# Altium PCB Shredmaster.PcbDoc (part 1 of 3)
Units mm, origin at the board's own origin, x right, y up, seen from the top; angles counter-clockwise.
Board outline 59.06 x 78.97 mm, 2 copper layers (Top Layer, Bottom Layer); 83 components, 53 nets, 219 pads, 109 vias.
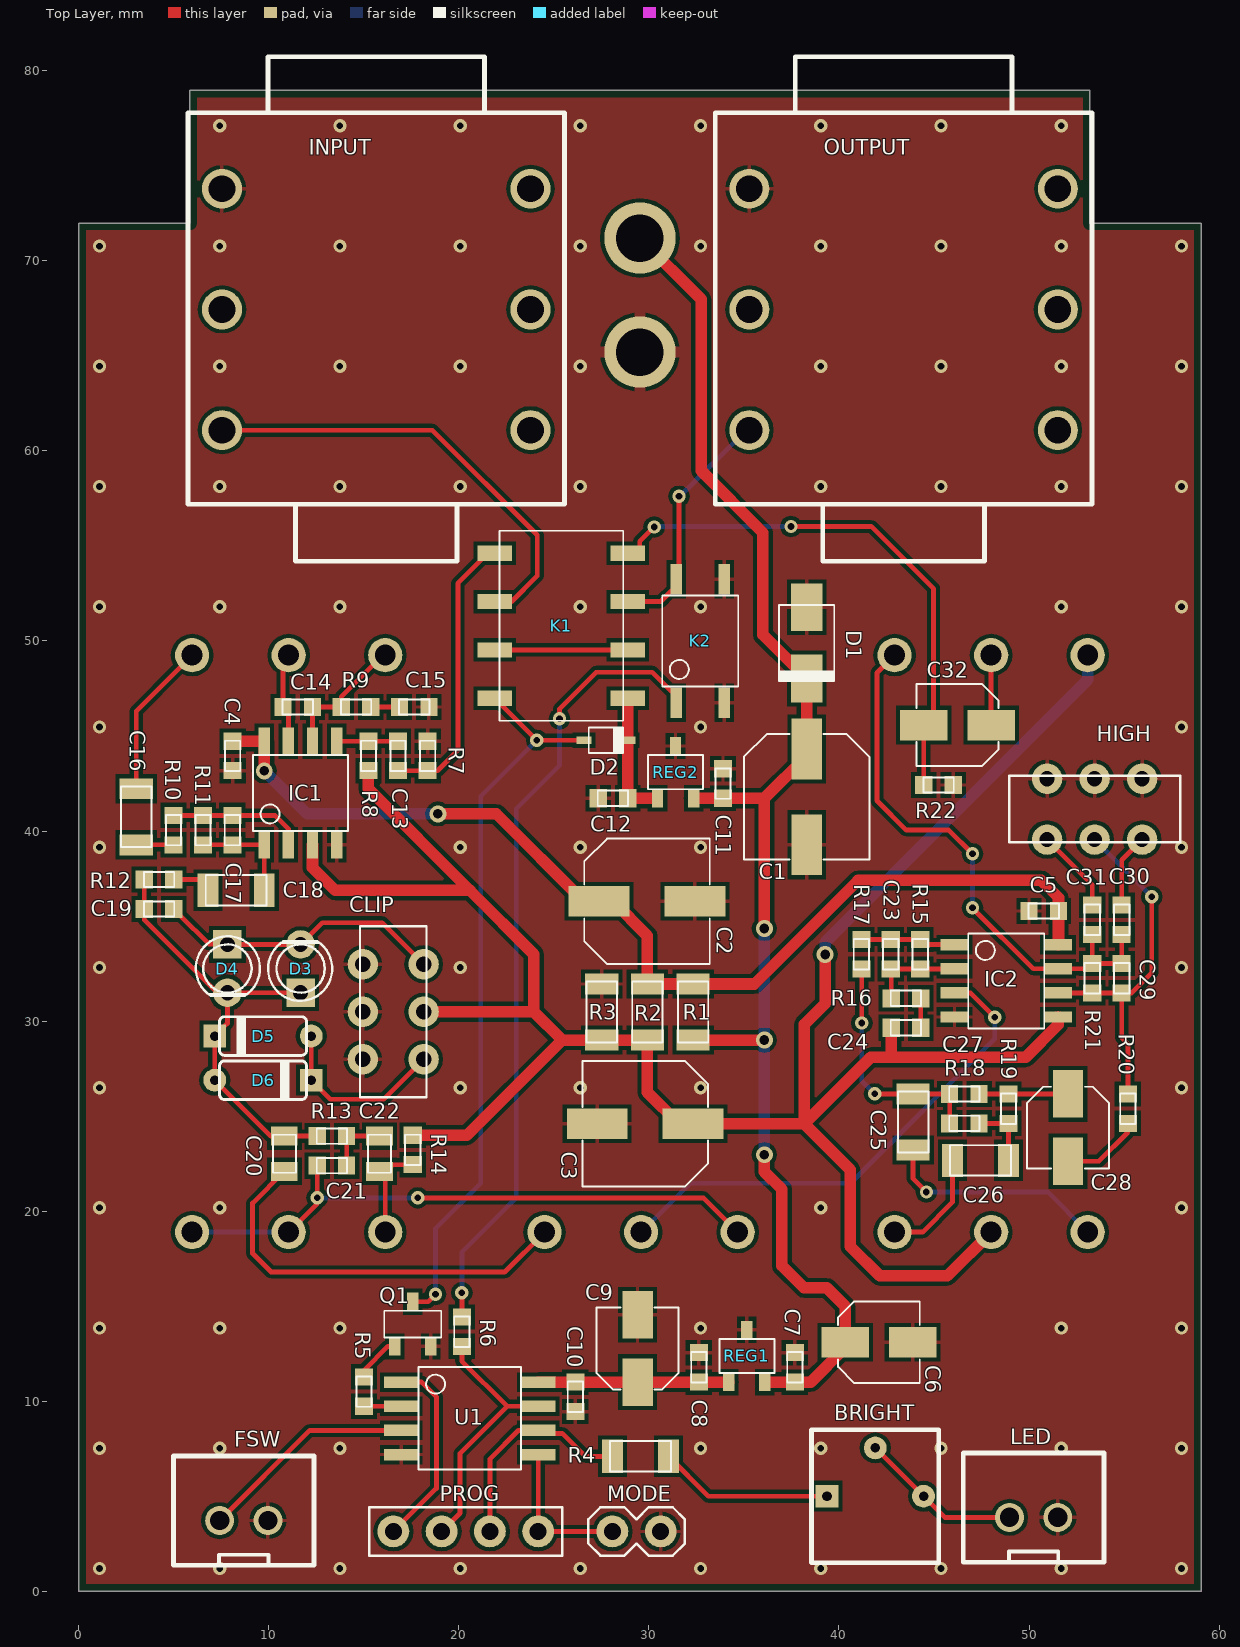
[diagram p0: Top Layer view]
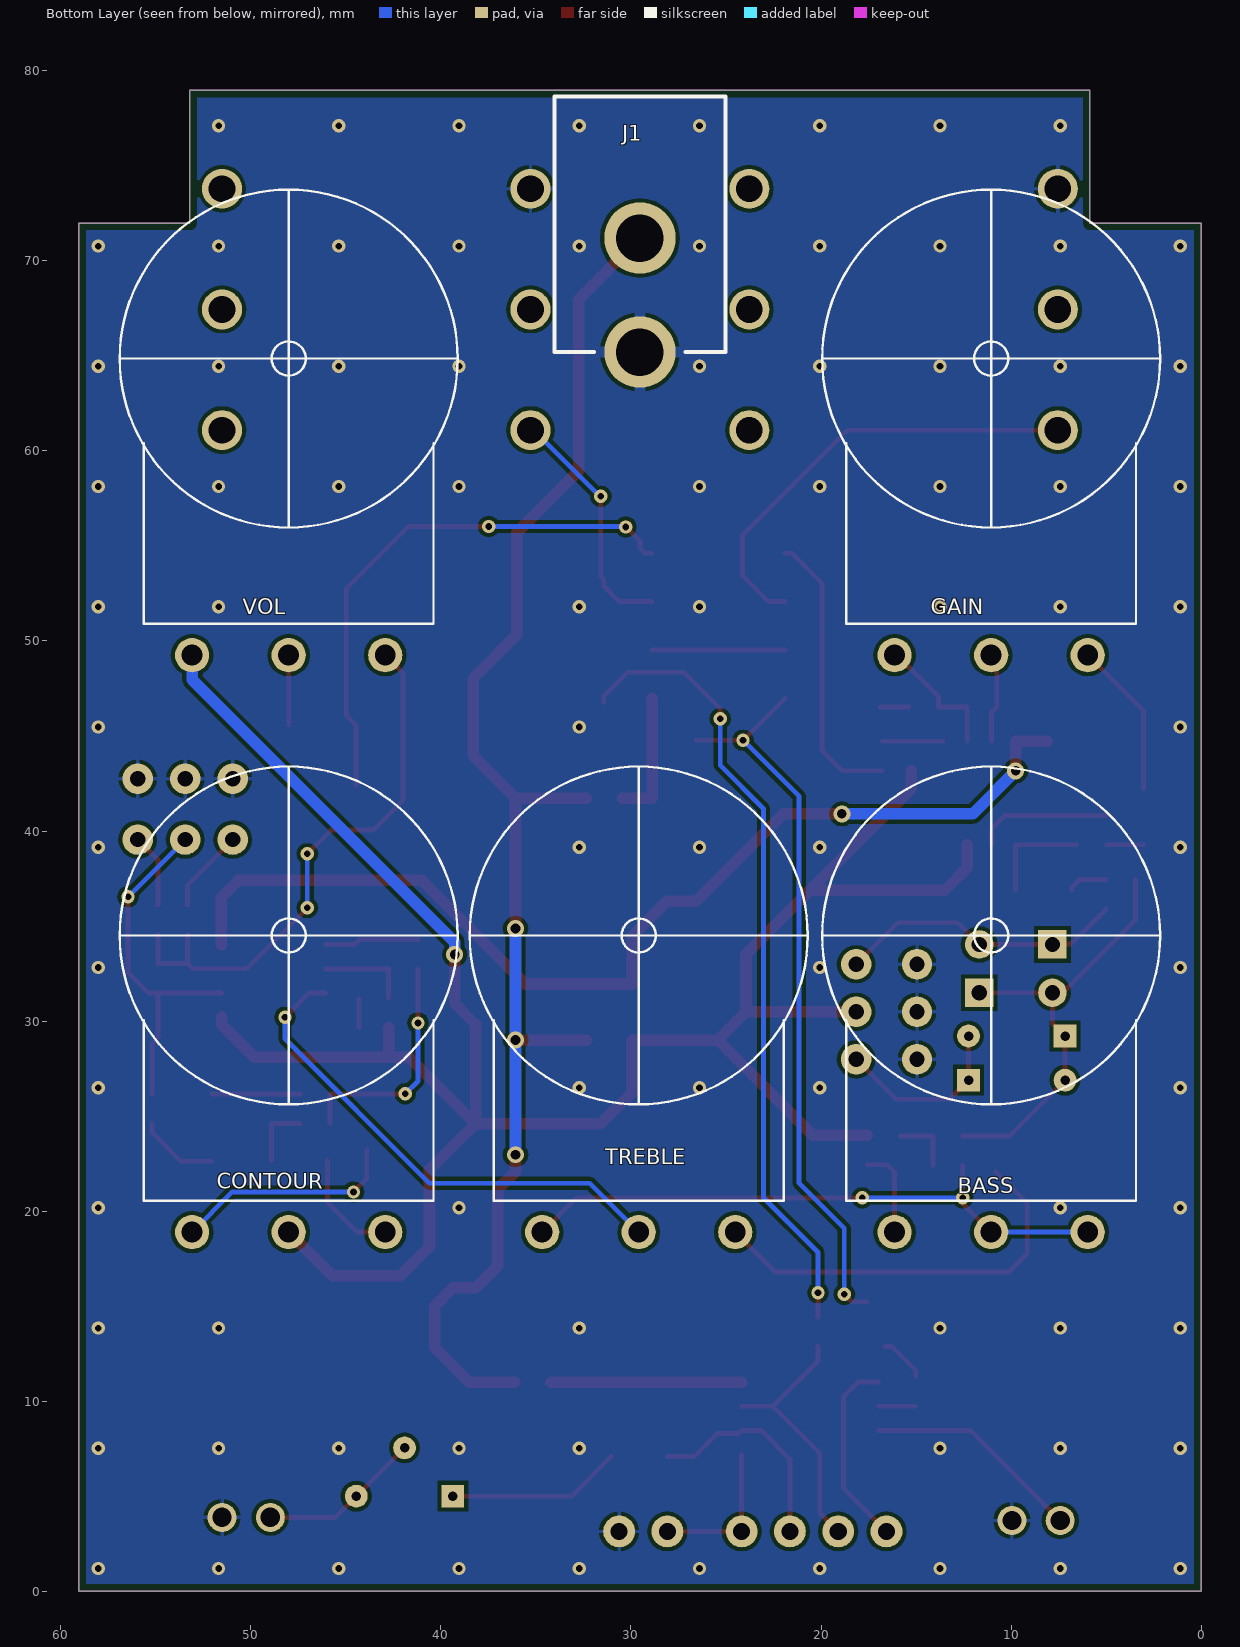
[diagram p1: Bottom Layer view, seen from below]
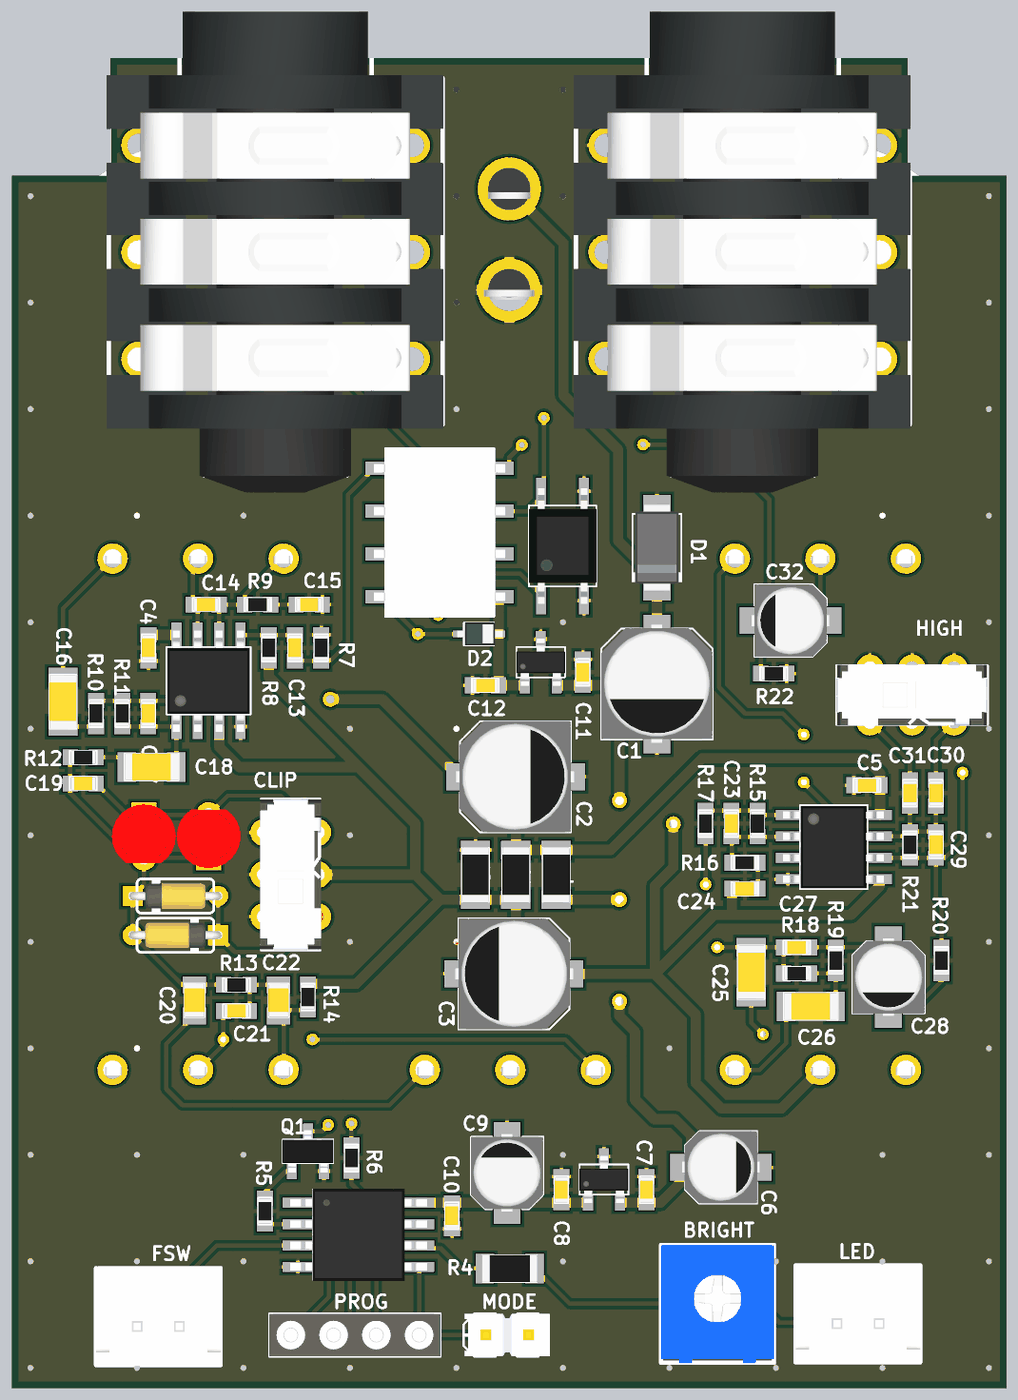
[diagram p2: 3D render of the assembled board from above, using the file's embedded part models]
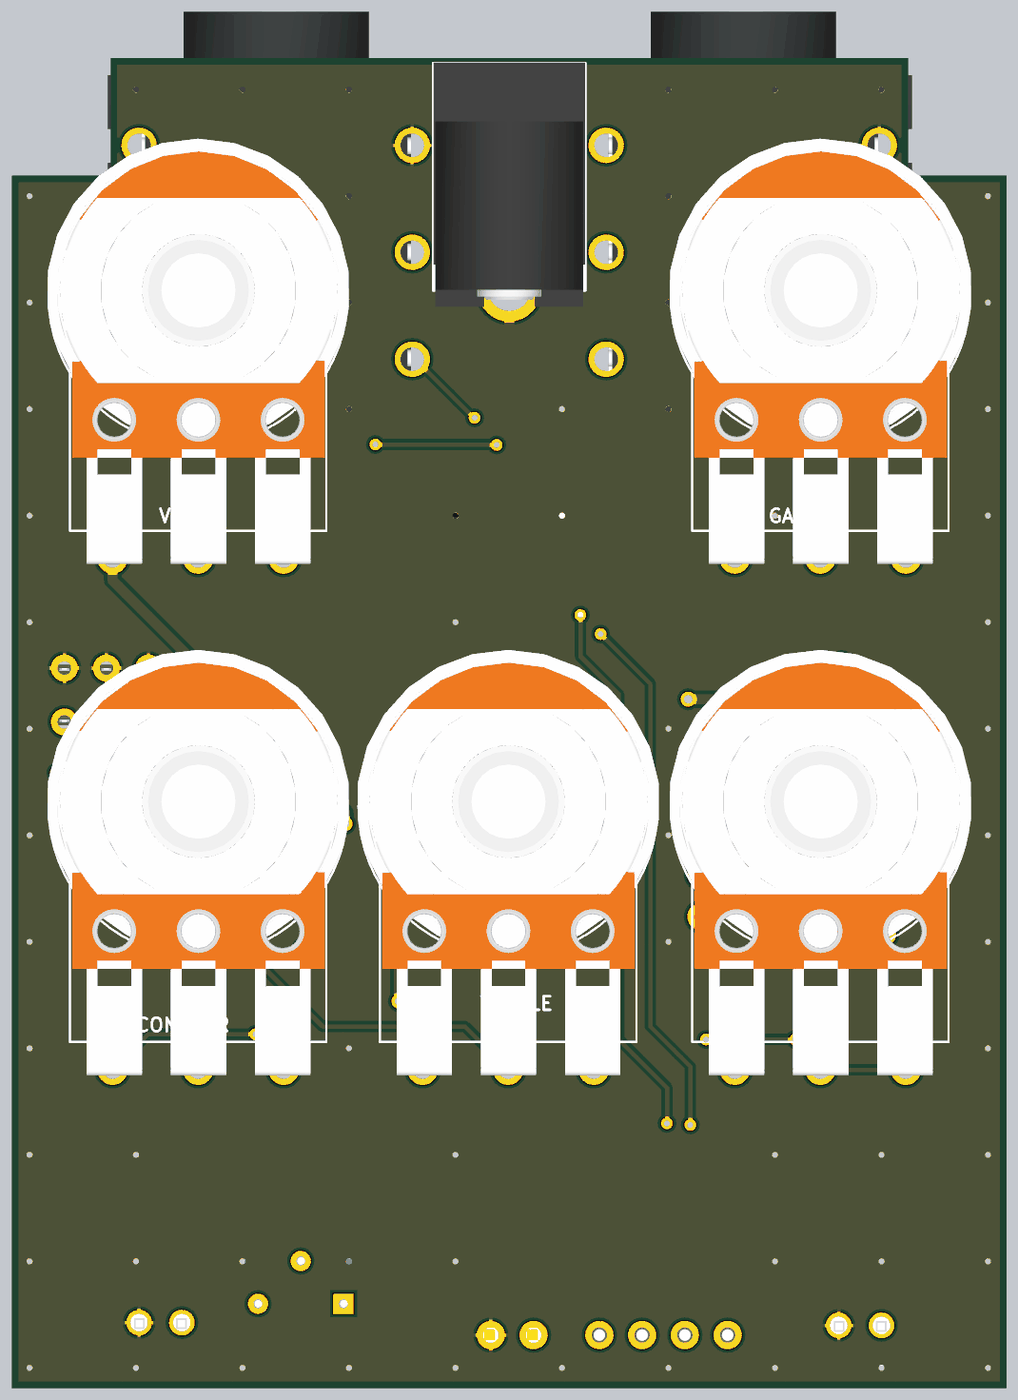
[diagram p3: 3D render of the assembled board from below, using the file's embedded part models]

## Layer stack, top to bottom
Top Solder: solder mask 0.0102, Solder Resist, Dk 3.5
Top Layer: signal copper 0.0356
Dielectric 1: dielectric 0.32, FR-4, Dk 4.8
Bottom Layer: signal copper 0.0356
Bottom Solder: solder mask 0.0102, Solder Resist, Dk 3.5

## Board outline
53.204,78.971 53.204,71.986 59.055,71.986 59.055,0 0,0 0,71.986 5.85,71.986 5.85,78.971

## Design rules (kind name [scope] priority, off if disabled: settings)
BoardOutlineClearance BottomOverlay [OnLayer('Bottom Overlay')] p1: gap=0 ignorepadtopadclearanceinfootprint=FALSE
BoardOutlineClearance TopOverlay [OnLayer('Top Overlay')] p2: gap=0 ignorepadtopadclearanceinfootprint=FALSE
BoardOutlineClearance [All] p3: gap=0.381 ignorepadtopadclearanceinfootprint=FALSE
Clearance [All] p1: gap=0.203 ignorepadtopadclearanceinfootprint=FALSE except(0: Arc-Text Arc-Hole Track-Text Track-Hole SMDPad-Text SMDPad-Hole THPad-Text THPad-Hole Via-Text Via-Hole Fill-Text Fill-Hole Poly-Text Poly-Hole Region-Text Region-Hole Text-Text Text-Hole)
ComponentClearance [All] p1 off: gap=0.025 collisioncheckmode=3 verticalgap=0.025 showdistances=FALSE
DiffPairsRouting [All] p1: maxlimit=10 minlimit=0.152 mostfreqgap=0.203 toplayer_minwidth=0.152 toplayer_maxwidth=0.381 toplayer_prefwidth=0.203 bottomlayer_minwidth=0.152 bottomlayer_maxwidth=0.381 bottomlayer_prefwidth=0.203 maxuncoupledlength=12.7
Height [All] p1 off: minheight=0 maxheight=25.4 prefheight=12.7
HoleSize [All] p1: absolutevalues=TRUE maxlimit=6.731 minlimit=0.3 maxpercent=80.000 minpercent=20.000
HoleToHoleClearance [All] p1: gap=0.254 allowstackedmicrovias=FALSE
MinimumAnnularRing [All] p1: minimumring=0.152
MinimumSolderMaskSliver [All] p1: minsoldermaskwidth=0
PlaneClearance [All] p1: clearance=0.254
PlaneConnect [All] p1: planeconnectstyle=Direct reliefexpansion=0.406 reliefentries=4 reliefconductorwidth=0.152 reliefairgap=0.152
PolygonConnect PolygonConnect_J1 [InComponent ('J1')] p1: connectstyle=Relief reliefconductorwidth=0.61 reliefentries=4 polygonreliefangle="90 Angle" airgapwidth=0.203
PolygonConnect [All] p2: thpad.connectstyle=Relief thpad.reliefconductorwidth=0.203 thpad.reliefentries=4 thpad.polygonreliefangle="90 Angle" thpad.airgapwidth=0.203 smdpad.connectstyle=Relief smdpad.reliefconductorwidth=0.203 smdpad.reliefentries=4 smdpad.polygonreliefangle="90 Angle" smdpad.airgapwidth=0.203 via.connectstyle=Direct via.reliefconductorwidth=0.203 via.reliefentries=4 via.polygonreliefangle="90 Angle" via.airgapwidth=0.203
RoutingCorners [All] p1: cornerstyle=45-Degree minsetback=1.25 maxsetback=1.25
RoutingVias [All] p1: holewidth=0.35 width=0.7 viastyle="Through Hole" minholewidth=0.35 minwidth=0.7 maxholewidth=2.54 maxwidth=2.896
SilkToSilkClearance [All] p1 off: silktosilkclearance=0
SilkToSolderMaskClearance [IsPad] p1 off: minsilkscreentomaskgap=0.152 clearancetoexposedcopper=TRUE
SolderMaskExpansion [All] p1: expansion=0.075
Width [All] p1: maxlimit=0.61 minlimit=0.254 preferedwidth=0.254 minimp=50.000000 maximp=50.000000 favimp=50.000000
19 further rules are at their usual default settings.

## Components (designator, comment, footprint, x,y, rotation, side; value= is the part's Value field where it differs from the comment)
BASS "100kA" ALPHA_16mm_BOTTOM 11.049,18.884 r180 bottom locked
BRIGHT "10kB" BOURNS_3362P 41.904,5.006 r0 top
C1 "100u" CAPAE_D 38.3,41.8 r270 top
C2 "100u" CAPAE_D 29.9,36.3 r0 top
C3 "47u" CAPAE_D 29.8,24.6 r180 top
C4 "100n" CHIP_0603 8.103,43.95 r270 top
C5 "100n" CHIP_0603 50.775,35.794 r180 top
C6 "10u" CAPAE_B 42.101,13.107 r0 top
C7 "100n" CHIP_0603 37.68,11.782 r90 top
C8 "100n" CHIP_0603 32.63,11.782 r90 top
C9 "10u" CAPAE_B 29.403,12.779 r90 top
C10 "100n" CHIP_0603 26.131,10.232 r270 top
C11 "100n" CHIP_0603 33.9,42.5 r90 top
C12 "100n" CHIP_0603 28.111,41.725 r180 top
C13 "10n" CHIP_0603 16.797,43.95 r270 top
C14 "100p" CHIP_0603 11.527,46.522 r0 top
C15 "47n" CHIP_0603 17.647,46.525 r0 top
C16 "100n" CHIP_1206 3.025,40.75 r90 top
C17 "47p" CHIP_0603 8.086,40.05 r90 top
C18 "100n" CHIP_1206 8.287,36.884 r0 top
C19 "2.2n" CHIP_0603 4.226,35.9 r0 top
C20 "22n" CHIP_0805 10.825,23.022 r90 top
C21 "220n" CHIP_0603 13.325,22.397 r0 top
C22 "22n" CHIP_0805 15.825,23.022 r90 top
C23 "2.2n" CHIP_0603 42.725,33.519 r270 top
C24 "220n" CHIP_0603 43.525,29.65 r0 top
C25 "100n" CHIP_1206 43.9,24.694 r270 top
C26 "47n" CHIP_1206 47.442,22.669 r180 top
C27 "1n" CHIP_0603 46.6,26.169 r180 top
C28 "1u" CAPAE_B 52.05,24.397 r270 top
C29 "220p" CHIP_0603 54.875,32.259 r270 top
C30 "220p" CHIP_0603 54.875,35.325 r90 top
C31 "680p" CHIP_0603 53.325,35.325 r90 top
C32 "1u" CAPAE_B 46.234,45.575 r180 top
CLIP "DPDT" DPDT_SLIDE 14.8,34.99 r270 top
CONTOUR "100kB" ALPHA_16mm_BOTTOM 48.006,18.884 r180 bottom locked
D1 "S1A" DO214 38.3,49.9 r90 top
D2 "1N4148WS" SOD323 27.736,44.775 r180 top
D3 "D_LED" LED_3MM 11.675,32.765 r90 top
D4 "D_LED" LED_3MM 7.825,32.765 r270 top
D5 "1N4148" DO35_2 9.7,29.215 r0 top
D6 "1N4148" DO35_2 9.7,26.89 r180 top
FSW "J_JST-XH-02" JST-XH-02 8.687,3.725 r0 top
GAIN "250kB" ALPHA_16mm_BOTTOM 11.049,49.237 r180 bottom locked
HIGH "DPDT" DPDT_SLIDE 57.95,42.9 r180 top
IC1 "TL072" SO-8 11.667,42 r90 top
IC2 "TL072" SO-8 48.8,32.119 r0 top
INPUT "J_STEREO" STEREO 15.657,67.439 r90 top locked
J1 "J_DC_JACK" DC_JACK 29.528,75.851 r0 bottom locked
K1 "G6K" G6K 25.5,50.8 r180 top
K2 "TLP175A" TLP175A 32.7,50 r90 top
LED "J_JST-XH-02" JST-XH-02 50.24,3.889 r0 top
MODE "J_HEADER_2PINS" HEADER_2PINS 29.351,3.15 r0 top
OUTPUT "J_STEREO" STEREO 43.398,67.439 r90 top locked
PROG "J_HEADER_4PINS_FEM" HEADER_4Pins_FEM 17.825,3.15 r0 top
Q1 "MMBT3904" SOT23 17.575,14.06 r90 top
R1 "47R" CHIP_R_1206 32.322,30.478 r90 top
R2 "47k" CHIP_R_1206 29.922,30.478 r270 top
R3 "47k" CHIP_R_1206 27.522,30.478 r270 top
R4 "220R" CHIP_R_1206 29.556,7.1 r0 top
R5 "22k" CHIP_R_0603 15.016,10.51 r90 top
R6 "1k" CHIP_R_0603 20.16,13.66 r90 top
R7 "10M" CHIP_R_0603 18.36,43.95 r270 top
R8 "1M" CHIP_R_0603 15.245,43.95 r270 top
R9 "3.3k" CHIP_R_0603 14.591,46.522 r180 top
R10 "10k" CHIP_R_0603 4.986,40.05 r90 top
R11 "680k" CHIP_R_0603 6.536,40.05 r270 top
R12 "10k" CHIP_R_0603 4.226,37.45 r180 top
R13 "6.8k" CHIP_R_0603 13.325,23.947 r180 top
R14 "1k" CHIP_R_0603 17.575,23.222 r270 top
R15 "220k" CHIP_R_0603 44.275,33.519 r90 top
R16 "47k" CHIP_R_0603 43.525,31.2 r0 top
R17 "100R" CHIP_R_0603 41.175,33.519 r270 top
R18 "33k" CHIP_R_0603 46.6,24.619 r0 top
R19 "33k" CHIP_R_0603 48.917,25.394 r90 top
R20 "100k" CHIP_R_0603 55.2,25.394 r90 top
R21 "100k" CHIP_R_0603 53.325,32.259 r90 top
R22 "1M" CHIP_R_0603 45.237,42.425 r180 top
REG1 "78L05" SOT23-3 35.155,12.382 r90 top
REG2 "78L05" SOT23-3 31.4,43.1 r90 top
TREBLE "25kB" ALPHA_16mm_BOTTOM 29.591,18.884 r180 bottom locked
U1 "ATTINY85" SOP8 20.575,9.1 r0 top
VOL "100kA" ALPHA_16mm_BOTTOM 48.006,49.237 r180 bottom locked

## Footprints (in the part's own frame and the unit in brackets; to place one, negate y for a bottom-side part, rotate by r counter-clockwise, add the part's x,y. Pads: shape width x height; smd on the part's side, far side on the other; paste and mask are expansions set on the pad)
ALPHA_16mm_BOTTOM [mm]
  round 1.8 hole 1.1: 1(-5.08,0.016) 2(0,0.016) 3(5.08,0.016)
  silkscreen extent -8.89,1.67 8.89,24.51, body extent -8.99,-0.31 11.3,24.95, height 27.09
BOURNS_3362P [mm]
  rect 1.2x1.2 hole 0.5: 1(-2.534,0)
  round 1.2 hole 0.5: 2(0.006,2.54) 3(2.546,0)
  silkscreen extent -3.35,-3.51 3.35,3.49, body extent -3.35,-3.53 3.35,3.51, height 4.88
CAPAE_B [mm] "Aluminum Electrolytic Capacitor, Body 4.30x4.30x5.40mm, IPC Low Density"
  rect 2.5x1.6 smd: +(-1.772,0) -(1.772,0)
  silkscreen extent -2.15,-2.15 2.15,2.15, body extent -2.3,-2.14 2.3,2.16, height 5.41
CAPAE_D [mm] "Aluminum Electrolytic Capacitor, Body 6.60x6.60x5.40mm, IPC Low Density"
  rect 3.2x1.6 smd: +(-2.521,0) -(2.521,0)
  silkscreen extent -3.3,-3.3 3.3,3.3, body extent -3.53,-3.3 3.47,3.3, height 5.41
CHIP_0603 [mm] "Chip Capacitor, 2-Leads, Body 1.60x0.80mm, IPC Medium Density"
  rect 0.9x0.95 smd: 1(-0.775,0) 2(0.775,0)
  silkscreen extent -0.8,-0.4 0.8,0.4, body extent -0.75,-0.4 0.75,0.4, height 0.65
CHIP_0805 [mm] "Chip Capacitor, 2-Leads, Body 2.00x1.25mm, IPC Medium Density"
  rect 1x1.4 smd: 1(-0.925,0) 2(0.925,0)
  silkscreen extent -1,-0.6 1,0.6, body extent -1,-0.6 1,0.6, height 0.7
CHIP_1206 [mm] "Chip Capacitor, 2-Leads, Body 3.20x1.60mm, IPC Medium Density"
  rect 1.1x1.75 smd: 1(-1.475,0) 2(1.475,0)
  silkscreen extent -1.6,-0.8 1.6,0.8, body extent -1.6,-0.8 1.6,0.8, height 1.05
CHIP_R_0603 [mm] "Chip Resistor, 2-Leads, Body 1.60x0.80mm, IPC Medium Density"
  rect 0.9x0.95 smd: 1(-0.775,0) 2(0.775,0)
  silkscreen extent -0.8,-0.4 0.8,0.4, body extent -0.75,-0.4 0.75,0.4, height 0.63
CHIP_R_1206 [mm] "Chip Resistor 2-Leads, Body 3.20x1.60mm, IPC Medium Density"
  rect 1.1x1.75 smd: 1(-1.475,0) 2(1.475,0)
  silkscreen extent -1.6,-0.8 1.6,0.8, body extent -1.65,-0.8 1.65,0.8, height 0.76
DC_JACK [mm]
  round 3.75 hole 2.5: GND(0,4.652) PWR(0,10.652)
  silkscreen extent -4.5,-2.79 4.5,10.65, body extent -8.89,-2.86 4.5,11.64, height 11
DO35_2 [mm]
  round 1.2 hole 0.5: A(2.54,0)
  rect 1.2x1.2 hole 0.5: C(-2.54,0)
  silkscreen extent -2.29,-1.02 2.29,1.02, body extent -2.75,-0.75 2.75,0.75, height 1.51
DO214 [mm] "Molded Diode, 2-Leads, Body 4.30x2.63mm, IPC Medium Density"
  rect 2.5x1.65 smd: 1(-1.875,0) 2(1.875,0)
  silkscreen extent -2,-1.45 2,1.45, body extent -2.6,-1.3 2.6,1.3, height 2.4
DPDT_SLIDE [mm]
  round 1.6 hole 0.8: A1(2,3.35) A2(4.5,3.35) A3(7,3.35) B1(2,0.15) B2(4.5,0.15) B3(7,0.15)
  silkscreen extent 0,0 9,3.5, body extent 0,-0.05 9,3.55, height 5.5
G6K [mm]
  rect 1.8x0.8 smd: 1(-3.386,3.81) 2(-3.386,1.27) 3(-3.386,-1.27) 4(-3.386,-3.81) 5(3.614,-3.81) 6(3.614,-1.27) 7(3.614,1.27) 8(3.614,3.81)
  silkscreen extent -3.15,-5 3.35,5, body extent -3.8,-5 4,5, height 5.2
HEADER_2PINS [mil]
  round 66 hole 35.43: 1(50,0) 2(-50,0)
  silkscreen extent -100,-50 100,50, body extent -102,-50 102,50, height 330
HEADER_4Pins_FEM [mil]
  round 66 hole 35.43: 1(-50,0) 2(50,0) 3(150,0) 4(250,0)
  silkscreen extent -100,-50 300,50, body extent -100,-50 300,50, height 237
JST-XH-02 [mil]
  round 60 hole 40: 1(-50,0) 2(50,0)
  silkscreen extent -146,-93 146,134, body extent -146,-95 146,131, height 276
LED_3MM [mil]
  rect 59.06x59.06 hole 31.5: ANODE(-50,0)
  round 59.06 hole 31.5: P$1(50,0)
  silkscreen extent -67,-65 56,67, body extent -75,-75 160,75, height 221
SO-8 [mm] "SOIC, 8-Leads, Body 4.90x3.90mm, Pitch 1.27mm, IPC Medium Density"
  rect 1.45x0.6 smd: 1(-2.725,1.905) 2(-2.725,0.635) 3(-2.725,-0.635) 4(-2.725,-1.905) 5(2.725,-1.905) 6(2.725,-0.635) 7(2.725,0.635) 8(2.725,1.905)
  silkscreen extent -2,-2.5 2,2.5, body extent -3.02,-2.45 2.98,2.45, height 1.75
SOD323 [mm] "SODFL, 2-Leads, Body 1.25x2.50mm, IPC Medium Density"
  rect 0.8x0.4 smd: 1(-1.15,0) 2(1.15,0)
  silkscreen extent -0.9,-0.68 0.9,0.67, body extent -1.4,-0.68 1.3,0.67, height 0.79
SOP8 [mm] "SOP, 8-Leads, Body 5.24x5.29mm, Pitch 1.27mm, IPC Medium Density"
  rect 1.8x0.6 smd: 1(-3.6,1.905) 2(-3.6,0.635) 3(-3.6,-0.635) 4(-3.6,-1.905) 5(3.6,-1.905) 6(3.6,-0.635) 7(3.6,0.635) 8(3.6,1.905)
  silkscreen extent -2.7,-2.7 2.7,2.7, body extent -4.07,-2.74 4.07,2.74, height 1.9
SOT23 [mm] "SOT23, 3-Leads, Body 2.90x2.35mm, Pitch 0.95mm, IPC Medium Density"
  rect 0.95x0.6 smd: 1(-1.175,0.95) 2(-1.175,-0.95) 3(1.175,0)
  silkscreen extent -0.7,-1.5 0.7,1.5, body extent -1.25,-1.5 1.25,1.5, height 1.05
SOT23-3 [mm] "SOT23, 3-Leads, Body 2.80x2.80mm, Pitch 0.95mm, IPC Medium Density"
  rect 0.95x0.6 smd: 1(-1.375,0.95) 2(-1.375,-0.95) 3(1.375,0)
  silkscreen extent -0.9,-1.45 0.9,1.45, body extent -1.4,-1.45 1.4,1.45, height 1.3
STEREO [mm]
  round 2.1 hole 1.4: R(0,8.115) RN(0,-8.115) S(6.35,8.115) SN(6.35,-8.115) T(-6.35,8.115) TN(-6.35,-8.115)
  silkscreen extent -13.25,-9.91 13.3,9.91, body extent -14.28,-9.97 14.28,10.03, height 15.5
TLP175A [mm] "SOP, 4-Leads, Body 3.75x4.60mm, Pitch 2.54mm, IPC Medium Density"
  rect 1.6x0.6 smd: 1(-3.25,1.27) 3(-3.25,-1.27) 4(3.25,-1.27) 6(3.25,1.27)
  silkscreen extent -2.4,-2 2.4,2, body extent -3.43,-2 3.43,2, height 2.02

## Part data
BASS VOL: library part POT_100kA_ALPHA_16mm, "100k Log potentiometer round shaft", Package="PCB Mounted", Dimensions=16mm, Price=0.5
BRIGHT: library part TRIM_10kB_3362P, "10k Lin 3362P trimmer", Price=0.1
C1 C2: library part MCVVT025M101EA6L, "CAP ALUM 100UF 25V SMD", Capacitance=100uF, Manufacturer=Multicomp, Max Operating Temperature=105°C, Min Operating Temperature=-55°C, Ripple Current (AC)=6.3mA, Supplier Part Number 1=2611370, Voltage Rating=25V, ComponentLink1Description=http://www.farnell.com/datasheets/2151198.pdf?src-supplier=Element14, ComponentLink1URL=http://www.farnell.com/datasheets/2151198.pdf?src-supplier=Element14, Diameter=6.3mm, Height=7.7mm, Life (Hours)=2000Hour, Manufacturer Part Number=MCVVT025M101EA6L, Packaging="Tape and Reel", Pricing="1=0.157, 50=0.104, 100=0.0932, 250=0.0801, 500=0.0681 (EUR)", REACH SVHC="No SVHC", RoHS=No, Stock=1063, Supplier 1=Farnell, Voltage Rating (DC)=25V
C3: library part MCVVT025M470EA1L, "CAP ALUM 47UF 25V SMD", Capacitance=47uF, Manufacturer=Multicomp, Max Operating Temperature=105°C, Min Operating Temperature=-55°C, Ripple Current (AC)=6.3mA, Supplier Part Number 1=2611377, Voltage Rating=25V, ComponentLink1Description=http://www.farnell.com/datasheets/2151198.pdf?src-supplier=Farnell, ComponentLink1URL=http://www.farnell.com/datasheets/2151198.pdf?src-supplier=Farnell, ComponentLink2Description=http://www.farnell.com/datasheets/2151198.pdf?src-supplier=Element14, ComponentLink2URL=http://www.farnell.com/datasheets/2151198.pdf?src-supplier=Element14, Diameter=6.3mm, Height=5.4mm, Life (Hours)=2000Hour, Manufacturer Part Number=MCVVT025M470EA1L, Packaging="Cut Tape", Pricing="1=0.125, 50=0.0825, 100=0.0741, 250=0.0637, 500=0.0542 (EUR)", REACH SVHC="No SVHC", RoHS=No, Stock=1436, Supplier 1=Farnell, Voltage Rating (DC)=25V
C4 C5 C7 C8 C10 C11 C12: library part MC0603B104K500CT, "CAP CER 100NF 50V X7R 0603", Capacitance=100nF, Case/Package=0603, Case Code (Metric)=1608, Dielectric=X7R, Manufacturer=Multicomp, Max Operating Temperature=125°C, Min Operating Temperature=-55°C, Supplier Part Number 1=1759122, Tolerance=10%, Voltage Rating=50V, Case Code (Imperial)=0603, ComponentLink1Description=https://datasheet.ciiva.com/22686/1901289-22686278.pdf?src-supplier=Element14, ComponentLink1URL=https://datasheet.ciiva.com/22686/1901289-22686278.pdf?src-supplier=Element14, ComponentLink2Description=https://datasheet.ciiva.com/22686/1901289-22686279.pdf?src-supplier=Element14, ComponentLink2URL=https://datasheet.ciiva.com/22686/1901289-22686279.pdf?src-supplier=Element14, ComponentLink3Description=https://datasheet.ciiva.com/22648/1901289-22648411.pdf?src-supplier=Element14, ComponentLink3URL=https://datasheet.ciiva.com/22648/1901289-22648411.pdf?src-supplier=Element14, Manufacturer Part Number=MC0603B104K500CT, Number of Pins=2, Packaging="Cut Tape", REACH SVHC=Unknown, RoHS=Yes, Stock 1=1057763, Supplier 1=Farnell, Voltage Rating (DC)=50V
C6 C9: library part MCVVT025M100CA1L, "CAP ALUM 10UF 25V SMD", Capacitance=10uF, Manufacturer=Multicomp, Max Operating Temperature=105°C, Min Operating Temperature=-55°C, Ripple Current (AC)=4mA, Supplier Part Number 1=2611368, Voltage Rating=25V, ComponentLink1Description=http://www.farnell.com/datasheets/2151198.pdf?src-supplier=Element14, ComponentLink1URL=http://www.farnell.com/datasheets/2151198.pdf?src-supplier=Element14, Diameter=4mm, Height=5.4mm, Life (Hours)=2000Hour, Manufacturer Part Number=MCVVT025M100CA1L, Packaging="Cut Tape", Pricing="5=0.0897, 50=0.0592, 250=0.0457, 500=0.0388, 1000=0.0338 (EUR)", REACH SVHC="No SVHC", RoHS=No, Stock=2773, Supplier 1=Farnell, Voltage Rating (DC)=25V
C13: library part GRM1885C1H103JA01D, "CAP CER 10NF 50V C0G/NP0 0603", Capacitance=10nF, Case/Package=0603, Case Code (Metric)=1608, Dielectric=C0G, Manufacturer=Murata, Max Operating Temperature=125°C, Min Operating Temperature=-55°C, Package Quantity=4000, Supplier Part Number 1=2456107, Tolerance=5%, Voltage=50V, Case Code (Imperial)=0603, ComponentLink1Description=https://datasheet.ciiva.com/29537/partnumbering-e-01-29537910.pdf?src-supplier=Digi-Key, ComponentLink1URL=https://datasheet.ciiva.com/29537/partnumbering-e-01-29537910.pdf?src-supplier=Digi-Key, ComponentLink2Description=https://datasheet.ciiva.com/41860/partnumbering-e-01-41860759.pdf?src-supplier=Digi-Key, ComponentLink2URL=https://datasheet.ciiva.com/41860/partnumbering-e-01-41860759.pdf?src-supplier=Digi-Key, Depth=0.8mm, Height=0.8mm, Lead Free="Lead Free", Lead Pitch=0.5mm, Length=1.6mm, Manufacturer Part Number=GRM1885C1H103JA01D, Material=Ceramic, Mount="Surface Mount", Packaging="Tape and Reel", Pricing 1="10 = 0.16600, 100 = 0.07230, 500 = 0.04810, 1000 = 0.04130, 2000 = 0.03640 (EUR)", REACH SVHC="No SVHC", RoHS=Yes, Stock 1=99456, Supplier 1=Farnell, Termination=SMD/SMT, Thickness=0.035inch, Voltage Rating=50V, Voltage Rating (DC)=50V, Width=0.8mm
C14: library part MC0603N101J500CT, "CAP CER 100PF 50V C0G/NP0 0603", Capacitance=100pF, Case Code (Imperial)=0603, Case Code (Metric)=1608, Dielectric=C0G, Manufacturer=Multicomp, Max Operating Temperature=125°C, Min Operating Temperature=-55°C, Supplier Part Number 1=1759066, Tolerance=5%, Voltage Rating=50V, ComponentLink1Description=http://www.farnell.com/datasheets/1901289.pdf?src-supplier=Farnell, ComponentLink1URL=http://www.farnell.com/datasheets/1901289.pdf?src-supplier=Farnell, ComponentLink2Description=http://www.farnell.com/datasheets/1901289.pdf?src-supplier=Element14, ComponentLink2URL=http://www.farnell.com/datasheets/1901289.pdf?src-supplier=Element14, ComponentLink3Description=http://www.farnell.com/datasheets/1870456.pdf?src-supplier=Element14, ComponentLink3URL=http://www.farnell.com/datasheets/1870456.pdf?src-supplier=Element14, ComponentLink4Description=http://www.farnell.com/datasheets/1901289.pdf?src-supplier=Newark, ComponentLink4URL=http://www.farnell.com/datasheets/1901289.pdf?src-supplier=Newark, Manufacturer Part Number=MC0603N101J500CT, Packaging="Cut Tape", Pricing="10=0.0241, 100=0.0195, 500=0.0139, 1000=0.012, 2000=0.0095 (EUR)", REACH SVHC="No SVHC", RoHS=Yes, Stock=55061, Supplier 1=Farnell, Voltage Rating (DC)=50V
C15: library part MC0603B473K500CT, "CAP CER 47NF 50V X7R 0603", Capacitance=47nF, Case/Package=0603, Case Code (Metric)=1608, Dielectric=X7R, Manufacturer=Multicomp, Max Operating Temperature=125°C, Min Operating Temperature=-55°C, Supplier Part Number 1=1759116, Tolerance=10%, Voltage Rating=50V, Case Code (Imperial)=0603, ComponentLink1Description=https://datasheet.ciiva.com/7818/ta-1098-7818535.pdf?src-supplier=Element14, ComponentLink1URL=https://datasheet.ciiva.com/7818/ta-1098-7818535.pdf?src-supplier=Element14, ComponentLink2Description=https://datasheet.ciiva.com/6161/ta-1098-6161001.pdf?src-supplier=Farnell, ComponentLink2URL=https://datasheet.ciiva.com/6161/ta-1098-6161001.pdf?src-supplier=Farnell, ComponentLink3Description=https://datasheet.ciiva.com/22648/1901289-22648457.pdf?src-supplier=Element14, ComponentLink3URL=https://datasheet.ciiva.com/22648/1901289-22648457.pdf?src-supplier=Element14, ComponentLink4Description=https://datasheet.ciiva.com/22648/1901289-22648459.pdf?src-supplier=Element14, ComponentLink4URL=https://datasheet.ciiva.com/22648/1901289-22648459.pdf?src-supplier=Element14, ComponentLink5Description=https://datasheet.ciiva.com/22683/1901289-22683835.pdf?src-supplier=Element14, ComponentLink5URL=https://datasheet.ciiva.com/22683/1901289-22683835.pdf?src-supplier=Element14, Manufacturer Part Number=MC0603B473K500CT, Number of Pins=2, Packaging="Cut Tape", Pricing="10=0.0277, 100=0.0224, 500=0.0139, 1000=0.011, 2000=0.0101 (EUR)", REACH SVHC=Unknown, RoHS=Yes, Stock=25480, Supplier 1=Farnell, Voltage Rating (DC)=50V
C16 C18 C25: library part GRM31C5C1H104JA01L, "CAP CER 100NF 50V C0G/NP0 1206", Capacitance=100nF, Case/Package=1206, Case Code (Metric)=3216, Dielectric=C0G, Manufacturer=Murata, Max Operating Temperature=125°C, Min Operating Temperature=-55°C, Package Quantity=1, Supplier Part Number 1=2494294, Temperature Coefficient=30ppm/°C, Tolerance=5%, Voltage=50V, Case Code (Imperial)=1206, ComponentLink1Description=https://datasheet.ciiva.com/11618/product-11618880.pdf?src-supplier=Avnet, ComponentLink1URL=https://datasheet.ciiva.com/11618/product-11618880.pdf?src-supplier=Avnet, ComponentLink2Description=https://datasheet.ciiva.com/29200/453430-da-01-en-vs-kondensator-1206-29200201.pdf?src-supplier=Conrad, ComponentLink2URL=https://datasheet.ciiva.com/29200/453430-da-01-en-vs-kondensator-1206-29200201.pdf?src-supplier=Conrad, ComponentLink3Description=https://datasheet.ciiva.com/5420/product-5420070.pdf?src-supplier=Mouser, ComponentLink3URL=https://datasheet.ciiva.com/5420/product-5420070.pdf?src-supplier=Mouser, ComponentLink4Description=https://datasheet.ciiva.com/16461/product-16461275.pdf?src-supplier=Future+Electronics, ComponentLink4URL=https://datasheet.ciiva.com/16461/product-16461275.pdf?src-supplier=Future+Electronics, ComponentLink5Description=https://datasheet.ciiva.com/6270/partnumbering-e-01-6270255.pdf?src-supplier=Digi-Key, ComponentLink5URL=https://datasheet.ciiva.com/6270/partnumbering-e-01-6270255.pdf?src-supplier=Digi-Key, Depth=1.6mm, Height=1.6mm, Lead Free="Lead Free", Length=3.2mm, Manufacturer Part Number=GRM31C5C1H104JA01L, Material=Ceramic, Mount="Surface Mount", Packaging="Tape and Reel", Pricing 1="5 = 0.62500, 50 = 0.31000, 250 = 0.29700, 500 = 0.22200, 1000 = 0.18900 (EUR)", Radiation Hardening=No, REACH SVHC="No SVHC", RoHS=Yes, Stock 1=206865, Supplier 1=Farnell, Termination=SMD/SMT, Thickness=0.071inch, Voltage Rating=50V, Voltage Rating (DC)=50V, Weight=0.000571oz, Width=0.063inch
C17: library part MC0603N470J500CT, "CAP CER 47PF 50V C0G/NP0 0603", Capacitance=47pF, Case/Package=0603, Case Code (Metric)=1608, Dielectric=C0G, Manufacturer=Multicomp, Max Operating Temperature=125°C, Min Operating Temperature=-55°C, Supplier Part Number 1=1759062, Temperature Coefficient=30ppm/°C, Tolerance=5%, Voltage Rating=50V, Case Code (Imperial)=0603, ComponentLink1Description=https://datasheet.ciiva.com/22648/1901289-22648503.pdf?src-supplier=Element14, ComponentLink1URL=https://datasheet.ciiva.com/22648/1901289-22648503.pdf?src-supplier=Element14, ComponentLink2Description=https://datasheet.ciiva.com/22682/1901289-22682812.pdf?src-supplier=Element14, ComponentLink2URL=https://datasheet.ciiva.com/22682/1901289-22682812.pdf?src-supplier=Element14, ComponentLink3Description=https://datasheet.ciiva.com/22682/1901289-22682813.pdf?src-supplier=Element14, ComponentLink3URL=https://datasheet.ciiva.com/22682/1901289-22682813.pdf?src-supplier=Element14, Manufacturer Part Number=MC0603N470J500CT, Number of Pins=2, Packaging="Tape and Reel", Pricing="10=0.0246, 100=0.0199, 500=0.0123, 1000=0.0097, 2000=0.0089 (EUR)", REACH SVHC=Unknown, RoHS=Yes, Stock=148629, Supplier 1=Farnell, Voltage Rating (DC)=50V, Width=0.8mm
C19 C23: library part GRM1885C1H222JA01D, "CAP CER 2.2NF 50V C0G/NP0 0603", Capacitance=2.2nF, Case/Package=0603, Case Code (Metric)=1608, Dielectric=C0G, Dielectric Material=Ceramic, Insulation Resistance=10GR, Manufacturer=Murata, Max Operating Temperature=125°C, Min Operating Temperature=-55°C, Package Quantity=1, Supplier Part Number 1=8819947, Temperature Coefficient=30ppm/°C, Tolerance=5%, Voltage=50V, Case Code (Imperial)=0603, ComponentLink1Description=https://datasheet.ciiva.com/11786/0900766b807a1cab-11786840.pdf?src-supplier=RSComponents, ComponentLink1URL=https://datasheet.ciiva.com/11786/0900766b807a1cab-11786840.pdf?src-supplier=RSComponents, ComponentLink2Description=https://datasheet.ciiva.com/3777/1632grm1885c1h222ja0123-3777835.pdf?src-supplier=Arrow, ComponentLink2URL=https://datasheet.ciiva.com/3777/1632grm1885c1h222ja0123-3777835.pdf?src-supplier=Arrow, ComponentLink3Description=https://datasheet.ciiva.com/2989/product-2989459.pdf?src-supplier=Avnet, ComponentLink3URL=https://datasheet.ciiva.com/2989/product-2989459.pdf?src-supplier=Avnet, ComponentLink4Description=https://datasheet.ciiva.com/6031/4360-6031797.pdf?src-supplier=Farnell, ComponentLink4URL=https://datasheet.ciiva.com/6031/4360-6031797.pdf?src-supplier=Farnell, ComponentLink5Description=https://datasheet.ciiva.com/7828/4360-7828918.pdf?src-supplier=Element14, ComponentLink5URL=https://datasheet.ciiva.com/7828/4360-7828918.pdf?src-supplier=Element14, ComponentLink6Description=https://datasheet.ciiva.com/11463/product-11463974.pdf?src-supplier=Avnet, ComponentLink6URL=https://datasheet.ciiva.com/11463/product-11463974.pdf?src-supplier=Avnet, ComponentLink7Description=https://datasheet.ciiva.com/16624/product-16624150.pdf?src-supplier=Avnet+Europe, ComponentLink7URL=https://datasheet.ciiva.com/16624/product-16624150.pdf?src-supplier=Avnet+Europe, ComponentLink8Description=https://datasheet.ciiva.com/7828/1747455-7828919.pdf?src-supplier=Element14, ComponentLink8URL=https://datasheet.ciiva.com/7828/1747455-7828919.pdf?src-supplier=Element14, ComponentLink9Description=https://datasheet.ciiva.com/133/partnumbering-e-01-133576.pdf?src-supplier=Digi-Key, ComponentLink9URL=https://datasheet.ciiva.com/133/partnumbering-e-01-133576.pdf?src-supplier=Digi-Key, ComponentLink10Description=https://datasheet.ciiva.com/7828/1747455-7828920.pdf?src-supplier=Element14, ComponentLink10URL=https://datasheet.ciiva.com/7828/1747455-7828920.pdf?src-supplier=Element14, ComponentLink11Description=https://datasheet.ciiva.com/133/partnumbering-e-01-133577.pdf?src-supplier=Digi-Key, ComponentLink11URL=https://datasheet.ciiva.com/133/partnumbering-e-01-133577.pdf?src-supplier=Digi-Key, ComponentLink12Description=https://datasheet.ciiva.com/133/partnumbering-e-01-133578.pdf?src-supplier=Digi-Key, ComponentLink12URL=https://datasheet.ciiva.com/133/partnumbering-e-01-133578.pdf?src-supplier=Digi-Key, ComponentLink13Description=https://datasheet.ciiva.com/29241/450664-da-01-en-vs-kondensator-0603-29241770.pdf?src-supplier=Conrad, ComponentLink13URL=https://datasheet.ciiva.com/29241/450664-da-01-en-vs-kondensator-0603-29241770.pdf?src-supplier=Conrad, Depth=0.8mm, Height=0.8mm, Lead Free="Lead Free", Length=1.6mm, Manufacturer Part Number=GRM1885C1H222JA01D, Material=Ceramic, Mount="Surface Mount", Number of Pins=2, Packaging="Tape and Reel", Pricing 1="10 = 0.11000, 100 = 0.05180, 500 = 0.04100, 1000 = 0.03510, 2000 = 0.03080 (EUR)", Radiation Hardening=No, REACH SVHC="No SVHC", RoHS=Yes, Stock 1=81117, Supplier 1=Farnell, Termination=SMD/SMT, Thickness=0.035inch, Voltage Rating=50V, Voltage Rating (DC)=50V, Width=0.8mm
C20 C22: library part GRM21B5C1H223JA01L, "CAP CER 22NF 50V C0G/NP0 0805", Capacitance=22nF, Case/Package=0805, Case Code (Metric)=2012, Dielectric=C0G, Manufacturer=Murata, Max Operating Temperature=125°C, Min Operating Temperature=-55°C, Package Quantity=1, Supplier Part Number 1=1828943, Temperature Coefficient=30ppm/°C, Tolerance=5%, Voltage=25V, Voltage Rating=50V, Case Code (Imperial)=0805, ComponentLink1Description=https://datasheet.ciiva.com/2989/product-2989681.pdf?src-supplier=Avnet, ComponentLink1URL=https://datasheet.ciiva.com/2989/product-2989681.pdf?src-supplier=Avnet, ComponentLink2Description=https://datasheet.ciiva.com/29042/1858738-29042965.pdf?src-supplier=Jameco, ComponentLink2URL=https://datasheet.ciiva.com/29042/1858738-29042965.pdf?src-supplier=Jameco, ComponentLink3Description=https://datasheet.ciiva.com/3777/99grm21b5c1h223ja0123-3777023.pdf?src-supplier=Arrow, ComponentLink3URL=https://datasheet.ciiva.com/3777/99grm21b5c1h223ja0123-3777023.pdf?src-supplier=Arrow, ComponentLink4Description=https://datasheet.ciiva.com/29200/453051-da-01-en-vs-kondensator-0805-29200670.pdf?src-supplier=Conrad, ComponentLink4URL=https://datasheet.ciiva.com/29200/453051-da-01-en-vs-kondensator-0805-29200670.pdf?src-supplier=Conrad, ComponentLink5Description=https://datasheet.ciiva.com/138/partnumbering-e-01-138787.pdf?src-supplier=Digi-Key, ComponentLink5URL=https://datasheet.ciiva.com/138/partnumbering-e-01-138787.pdf?src-supplier=Digi-Key, ComponentLink6Description=https://datasheet.ciiva.com/138/partnumbering-e-01-138789.pdf?src-supplier=Digi-Key, ComponentLink6URL=https://datasheet.ciiva.com/138/partnumbering-e-01-138789.pdf?src-supplier=Digi-Key, ComponentLink7Description=https://datasheet.ciiva.com/22703/608985-22703464.pdf?src-supplier=Element14, ComponentLink7URL=https://datasheet.ciiva.com/22703/608985-22703464.pdf?src-supplier=Element14, ComponentLink8Description=https://datasheet.ciiva.com/7828/608985-7828990.pdf?src-supplier=Element14, ComponentLink8URL=https://datasheet.ciiva.com/7828/608985-7828990.pdf?src-supplier=Element14, ComponentLink9Description=https://datasheet.ciiva.com/138/partnumbering-e-01-138788.pdf?src-supplier=Digi-Key, ComponentLink9URL=https://datasheet.ciiva.com/138/partnumbering-e-01-138788.pdf?src-supplier=Digi-Key, Depth=1.25mm, Height=1.25mm, Lead Free="Lead Free", Length=2mm, Manufacturer Part Number=GRM21B5C1H223JA01L, Material=Ceramic, Mount="Surface Mount", Number of Pins=2, Packaging="Tape and Reel", Pricing 1="5 = 0.38000, 50 = 0.19100, 250 = 0.16400, 500 = 0.10400, 1500 = 0.08380 (EUR)", Radiation Hardening=No, REACH SVHC="No SVHC", RoHS=Yes, Stock 1=85144, Supplier 1=Farnell, Termination=SMD/SMT, Thickness=0.053inch, Voltage Rating (DC)=50V, Width=0.049inch
C21 C24: library part GCM188R71H224KA64D, "CAP CER 220n 50V X7R 0603", Capacitance=220nF, Case/Package=0603, Case Code (Metric)=1608, Dielectric=X7R, Manufacturer=Murata, Max Operating Temperature=125°C, Min Operating Temperature=-55°C, Package Quantity=10, Ratings=AEC-Q200, Supplier Part Number 1=2456085, Tolerance=10%, Voltage=50V, Case Code (Imperial)=0603, ComponentLink1Description=https://datasheet.ciiva.com/26921/getdatasheetpartid-387764-26921786.pdf?src-supplier=Verical, ComponentLink1URL=https://datasheet.ciiva.com/26921/getdatasheetpartid-387764-26921786.pdf?src-supplier=Verical, ComponentLink2Description=https://datasheet.ciiva.com/136/s0717e-136042.pdf?src-supplier=Digi-Key, ComponentLink2URL=https://datasheet.ciiva.com/136/s0717e-136042.pdf?src-supplier=Digi-Key, ComponentLink3Description=https://datasheet.ciiva.com/136/s0717e-136043.pdf?src-supplier=Digi-Key, ComponentLink3URL=https://datasheet.ciiva.com/136/s0717e-136043.pdf?src-supplier=Digi-Key, Depth=0.8mm, Height=0.8mm, Lead Free="Lead Free", Length=1.6mm, Manufacturer Part Number=GCM188R71H224KA64D, Mount="Surface Mount", Packaging="Tape and Reel", Pricing="10=0.218, 100=0.0926, 500=0.0681, 1000=0.0597, 2000=0.048 (EUR)", Radiation Hardening=No, REACH SVHC="No SVHC", RoHS=Yes, Stock=115256, Supplier 1=Farnell, Termination=SMD/SMT, Thickness=0.035inch, Voltage Rating=50V, Voltage Rating (DC)=50V, Width=0.031inch
C26: library part GCM31M5C1H473JA16L, "CAP CER 47NF 50V C0G/NP0 1206", Capacitance=47nF, Case/Package=1206, Case Code (Metric)=3216, Dielectric=C0G, Manufacturer=Murata, Max Operating Temperature=125°C, Min Operating Temperature=-55°C, Package Quantity=1, Ratings=AEC-Q200, Supplier Part Number 1=2218706, Tolerance=5%, Voltage Rating=50V, Case Code (Imperial)=1206, ComponentLink1Description=https://datasheet.ciiva.com/136/s0720e-136368.pdf?src-supplier=Digi-Key, ComponentLink1URL=https://datasheet.ciiva.com/136/s0720e-136368.pdf?src-supplier=Digi-Key, ComponentLink2Description=https://datasheet.ciiva.com/11607/product-11607763.pdf?src-supplier=Avnet, ComponentLink2URL=https://datasheet.ciiva.com/11607/product-11607763.pdf?src-supplier=Avnet, ComponentLink3Description=https://datasheet.ciiva.com/18183/getdatasheetpartid-569724-18183753.pdf?src-supplier=Verical, ComponentLink3URL=https://datasheet.ciiva.com/18183/getdatasheetpartid-569724-18183753.pdf?src-supplier=Verical, ComponentLink4Description=https://datasheet.ciiva.com/140/s0717e-140734.pdf?src-supplier=Digi-Key, ComponentLink4URL=https://datasheet.ciiva.com/140/s0717e-140734.pdf?src-supplier=Digi-Key, ComponentLink5Description=https://datasheet.ciiva.com/140/s0717e-140735.pdf?src-supplier=Digi-Key, ComponentLink5URL=https://datasheet.ciiva.com/140/s0717e-140735.pdf?src-supplier=Digi-Key, Depth=1.6mm, Height=1.15mm, Length=3.2mm, Manufacturer Part Number=GCM31M5C1H473JA16L, Mount="Surface Mount", Packaging="Tape and Reel", Pricing 1="5 = 0.24800, 50 = 0.13700, 250 = 0.11600, 500 = 0.08300, 1500 = 0.07700, 3000 = 0.07360 (EUR)", Radiation Hardening=No, REACH SVHC="No SVHC", RoHS=Yes, Stock 1=4840, Supplier 1=Farnell, Termination=SMD/SMT, Thickness=0.049inch, Voltage Rating (DC)=50V, Width=0.063inch
C27: library part GRM1885C1H102JA01D, "CAP CER 1NF 50V C0G/NP0 0603", Capacitance=1nF, Case/Package=0603, Case Code (Metric)=1608, Dielectric=C0G, Dielectric Material=Ceramic, Insulation Resistance=10GR, Manufacturer=Murata, Max Operating Temperature=125°C, Min Operating Temperature=-55°C, Package Quantity=1, Supplier Part Number 1=8819920, Temperature Coefficient=30ppm/°C, Tolerance=5%, Voltage=50V, Case Code (Imperial)=0603, ComponentLink1Description=https://datasheet.ciiva.com/18184/getdatasheetpartid-153109-18184812.pdf?src-supplier=Verical, ComponentLink1URL=https://datasheet.ciiva.com/18184/getdatasheetpartid-153109-18184812.pdf?src-supplier=Verical, ComponentLink2Description=https://datasheet.ciiva.com/29149/450301-da-01-en-vs-kondensator-0603-29149020.pdf?src-supplier=Conrad, ComponentLink2URL=https://datasheet.ciiva.com/29149/450301-da-01-en-vs-kondensator-0603-29149020.pdf?src-supplier=Conrad, ComponentLink3Description=https://datasheet.ciiva.com/5421/product-5421450.pdf?src-supplier=Mouser, ComponentLink3URL=https://datasheet.ciiva.com/5421/product-5421450.pdf?src-supplier=Mouser, ComponentLink4Description=https://datasheet.ciiva.com/131/partnumbering-e-01-131963.pdf?src-supplier=Digi-Key, ComponentLink4URL=https://datasheet.ciiva.com/131/partnumbering-e-01-131963.pdf?src-supplier=Digi-Key, ComponentLink5Description=https://datasheet.ciiva.com/131/partnumbering-e-01-131964.pdf?src-supplier=Digi-Key, ComponentLink5URL=https://datasheet.ciiva.com/131/partnumbering-e-01-131964.pdf?src-supplier=Digi-Key, ComponentLink6Description=https://datasheet.ciiva.com/6072/4360-6072460.pdf?src-supplier=Farnell, ComponentLink6URL=https://datasheet.ciiva.com/6072/4360-6072460.pdf?src-supplier=Farnell, ComponentLink7Description=https://datasheet.ciiva.com/131/partnumbering-e-01-131965.pdf?src-supplier=Digi-Key, ComponentLink7URL=https://datasheet.ciiva.com/131/partnumbering-e-01-131965.pdf?src-supplier=Digi-Key, ComponentLink8Description=https://datasheet.ciiva.com/7828/1784402-7828893.pdf?src-supplier=Element14, ComponentLink8URL=https://datasheet.ciiva.com/7828/1784402-7828893.pdf?src-supplier=Element14, ComponentLink9Description=https://datasheet.ciiva.com/7828/1784402-7828894.pdf?src-supplier=Element14, ComponentLink9URL=https://datasheet.ciiva.com/7828/1784402-7828894.pdf?src-supplier=Element14, ComponentLink10Description=https://datasheet.ciiva.com/7828/4360-7828895.pdf?src-supplier=Element14, ComponentLink10URL=https://datasheet.ciiva.com/7828/4360-7828895.pdf?src-supplier=Element14, Depth=0.8mm, Height=0.8mm, Lead Free="Lead Free", Length=1.6mm, Manufacturer Part Number=GRM1885C1H102JA01D, Material=Ceramic, Mount="Surface Mount", Number of Pins=2, Packaging="Tape and Reel", Pricing 1="10 = 0.08650, 100 = 0.03970, 500 = 0.02290, 1000 = 0.01860, 2000 = 0.01690 (EUR)", Radiation Hardening=No, REACH SVHC="No SVHC", RoHS=Yes, Stock 1=138332, Supplier 1=Farnell, Termination=SMD/SMT, Thickness=0.035inch, Voltage Rating=50V, Voltage Rating (DC)=50V, Width=0.8mm
C28 C32: library part EEEFC1H1R0R, "CAP ALUM 1UF 50V LESR SMD", Capacitance=1uF, Case/Package=Radial, Dielectric Material=Aluminium, ESR (Equivalent Series Resistance)=5R, Leakage Current=3uA, Manufacturer=Panasonic, Max Operating Temperature=105°C, Min Operating Temperature=-40°C, Package Quantity=2000, Ripple Current=30mA, Supplier Part Number 1=9694528, Tolerance=20%, Voltage=50V, ComponentLink1Description=https://datasheet.ciiva.com/11779/0900766b806bc525-11779769.pdf?src-supplier=RSComponents, ComponentLink1URL=https://datasheet.ciiva.com/11779/0900766b806bc525-11779769.pdf?src-supplier=RSComponents, ComponentLink2Description=https://datasheet.ciiva.com/29313/443524-da-01-en-smd-elko-vfc-b-1-0-uf-50v-29313787.pdf?src-supplier=Conrad, ComponentLink2URL=https://datasheet.ciiva.com/29313/443524-da-01-en-smd-elko-vfc-b-1-0-uf-50v-29313787.pdf?src-supplier=Conrad, ComponentLink3Description=https://datasheet.ciiva.com/10331/aba0000ce5-10331045.pdf?src-supplier=Avnet, ComponentLink3URL=https://datasheet.ciiva.com/10331/aba0000ce5-10331045.pdf?src-supplier=Avnet, ComponentLink4Description=https://datasheet.ciiva.com/43485/31718-43485413.pdf?src-supplier=Farnell, ComponentLink4URL=https://datasheet.ciiva.com/43485/31718-43485413.pdf?src-supplier=Farnell, ComponentLink5Description=https://datasheet.ciiva.com/17353/aba0000ce5-17353382.pdf?src-supplier=Avnet+Europe, ComponentLink5URL=https://datasheet.ciiva.com/17353/aba0000ce5-17353382.pdf?src-supplier=Avnet+Europe, ComponentLink6Description=https://datasheet.ciiva.com/24024/aba0000ce5-68492-24024840.pdf?src-supplier=Mouser, ComponentLink6URL=https://datasheet.ciiva.com/24024/aba0000ce5-68492-24024840.pdf?src-supplier=Mouser, ComponentLink7Description=https://datasheet.ciiva.com/48542/eeefc-series-eng-tds-48542747.pdf?src-supplier=Distrelec, ComponentLink7URL=https://datasheet.ciiva.com/48542/eeefc-series-eng-tds-48542747.pdf?src-supplier=Distrelec, ComponentLink8Description=https://datasheet.ciiva.com/30181/aba0000ce5-30181516.pdf?src-supplier=Onlinecomponents.com, ComponentLink8URL=https://datasheet.ciiva.com/30181/aba0000ce5-30181516.pdf?src-supplier=Onlinecomponents.com, ComponentLink9Description=https://datasheet.ciiva.com/14596/70068018-14596941.pdf?src-supplier=Allied+Electronics, ComponentLink9URL=https://datasheet.ciiva.com/14596/70068018-14596941.pdf?src-supplier=Allied+Electronics, ComponentLink10Description=https://datasheet.ciiva.com/46388/31718-46388238.pdf?src-supplier=Element14, ComponentLink10URL=https://datasheet.ciiva.com/46388/31718-46388238.pdf?src-supplier=Element14, ComponentLink11Description=https://datasheet.ciiva.com/14606/70256381-14606527.pdf?src-supplier=Allied+Electronics, ComponentLink11URL=https://datasheet.ciiva.com/14606/70256381-14606527.pdf?src-supplier=Allied+Electronics, Contact Plating=Tin, Diameter=4mm, Height=5.4mm, Height - Seated (Max)=0.213inch, Impedance=5R, Lead Free="Lead Free", Lead Length=1.8mm, Lead Pitch=1mm, Length=5.5mm, Life (Hours)=1000Hour, Manufacturer Part Number=EEEFC1H1R0R, Material=Aluminium, Mount="Surface Mount", Number of Pins=2, Packaging="Tape and Reel", Pricing 1="5 = 0.29200, 50 = 0.15100, 250 = 0.12600, 500 = 0.09460, 1000 = 0.07990 (EUR)", Radiation Hardening=No, REACH SVHC="No SVHC", Ripple Current (AC)=30mA, RoHS=Yes, Stock 1=3801, Supplier 1=Farnell, Termination=SMD/SMT, Voltage Rating=50V, Voltage Rating (DC)=50V, Width=4.3mm
C29 C30: library part MC0603N221J500CT, "CAP CER 220PF 50V C0G/NP0 0603", Capacitance=220pF, Case/Package=0603, Case Code (Metric)=1608, Dielectric=C0G, Manufacturer=Multicomp, Max Operating Temperature=125°C, Min Operating Temperature=-55°C, Supplier Part Number 1=1759071, Tolerance=5%, Voltage Rating=50V, Case Code (Imperial)=0603, ComponentLink1Description=https://datasheet.ciiva.com/22648/1901289-22648489.pdf?src-supplier=Element14, ComponentLink1URL=https://datasheet.ciiva.com/22648/1901289-22648489.pdf?src-supplier=Element14, ComponentLink2Description=https://datasheet.ciiva.com/22675/1901289-22675354.pdf?src-supplier=Element14, ComponentLink2URL=https://datasheet.ciiva.com/22675/1901289-22675354.pdf?src-supplier=Element14, ComponentLink3Description=https://datasheet.ciiva.com/22675/1901289-22675355.pdf?src-supplier=Element14, ComponentLink3URL=https://datasheet.ciiva.com/22675/1901289-22675355.pdf?src-supplier=Element14, Manufacturer Part Number=MC0603N221J500CT, Number of Pins=2, Packaging="Cut Tape", Pricing="10=0.027, 100=0.0219, 500=0.0135, 1000=0.0107, 2000=0.0098 (EUR)", REACH SVHC=Unknown, RoHS=Yes, Stock=17812, Supplier 1=Farnell, Voltage Rating (DC)=50V
C31: library part MC0603N681J500CT, "CAP CER 680PF 50V C0G/NP0 0603", Capacitance=680pF, Case/Package=0603, Case Code (Metric)=1608, Dielectric=C0G, Manufacturer=Multicomp, Max Operating Temperature=125°C, Min Operating Temperature=-55°C, Supplier Part Number 1=1759084, Temperature Coefficient=30ppm/°C, Tolerance=5%, Voltage Rating=50V, Case Code (Imperial)=0603, ComponentLink1Description=http://www.farnell.com/datasheets/1901289.pdf?src-supplier=Farnell, ComponentLink1URL=http://www.farnell.com/datasheets/1901289.pdf?src-supplier=Farnell, ComponentLink2Description=http://www.farnell.com/datasheets/1901289.pdf?src-supplier=Element14, ComponentLink2URL=http://www.farnell.com/datasheets/1901289.pdf?src-supplier=Element14, Manufacturer Part Number=MC0603N681J500CT, Number of Pins=2, Packaging="Cut Tape", Pricing="10=0.0543, 100=0.0368, 500=0.0215, 1000=0.0197, 2000=0.0178 (EUR)", REACH SVHC=Unknown, RoHS=Yes, Stock=270, Supplier 1=Farnell, Voltage Rating (DC)=50V, Width=0.8mm
CLIP HIGH: library part SW_SLIDE_DPDT_ON-OFF-ON, "DPDT slide switch ON/OFF/ON", Price=0.05
CONTOUR: library part POT_100kB_ALPHA_16mm, "100k Lin potentiometer round shaft", Package="PCB Mounted", Dimensions=16mm, Price=0.5
D1: "DIODE GEN PURP 50V 1A SMA", Average Rectified Current=1A, Capacitance=12pF, Case/Package=SMA, Forward Voltage=1.1V, Manufacturer="ON Semiconductor / Fairchild", Max Forward Surge Current (Ifsm)=30A, Max Operating Temperature=150°C, Max Repetitive Reverse Voltage (Vrrm)=50V, Max Surge Current=40A, Min Operating Temperature=-55°C, Package Quantity=1, Peak Reverse Current=1uA, Power Dissipation=1.4W, Supplier Part Number 1=9843868, ComponentLink1Description=https://datasheet.ciiva.com/910/s1a-910480.pdf?src-supplier=Avnet, ComponentLink1URL=https://datasheet.ciiva.com/910/s1a-910480.pdf?src-supplier=Avnet, ComponentLink2Description=https://datasheet.ciiva.com/23683/1730038-23683616.pdf?src-supplier=Newark, ComponentLink2URL=https://datasheet.ciiva.com/23683/1730038-23683616.pdf?src-supplier=Newark, ComponentLink3Description=https://datasheet.ciiva.com/4452/s1a-191336-4452662.pdf?src-supplier=Mouser, ComponentLink3URL=https://datasheet.ciiva.com/4452/s1a-191336-4452662.pdf?src-supplier=Mouser, ComponentLink4Description=https://datasheet.ciiva.com/25624/0900766b80f9b629-25624903.pdf?src-supplier=RSComponents, ComponentLink4URL=https://datasheet.ciiva.com/25624/0900766b80f9b629-25624903.pdf?src-supplier=RSComponents, ComponentLink5Description=https://datasheet.ciiva.com/916/s1a-916898.pdf?src-supplier=Digi-Key, ComponentLink5URL=https://datasheet.ciiva.com/916/s1a-916898.pdf?src-supplier=Digi-Key, ComponentLink6Description=https://datasheet.ciiva.com/916/s1a-916899.pdf?src-supplier=Digi-Key, ComponentLink6URL=https://datasheet.ciiva.com/916/s1a-916899.pdf?src-supplier=Digi-Key, ComponentLink7Description=https://datasheet.ciiva.com/916/s1a-916900.pdf?src-supplier=Digi-Key, ComponentLink7URL=https://datasheet.ciiva.com/916/s1a-916900.pdf?src-supplier=Digi-Key, ComponentLink8Description=https://datasheet.ciiva.com/16800/s1a-16800103.pdf?src-supplier=Future+Electronics, ComponentLink8URL=https://datasheet.ciiva.com/16800/s1a-16800103.pdf?src-supplier=Future+Electronics, ComponentLink9Description=https://datasheet.ciiva.com/28469/1766308-28469031.pdf?src-supplier=Element14, ComponentLink9URL=https://datasheet.ciiva.com/28469/1766308-28469031.pdf?src-supplier=Element14, ComponentLink10Description=https://datasheet.ciiva.com/26231/s1k-26231832.pdf?src-supplier=Avnet+Europe, ComponentLink10URL=https://datasheet.ciiva.com/26231/s1k-26231832.pdf?src-supplier=Avnet+Europe, ComponentLink11Description=https://datasheet.ciiva.com/16474/s1k-16474283.pdf?src-supplier=Avnet+Asia, ComponentLink11URL=https://datasheet.ciiva.com/16474/s1k-16474283.pdf?src-supplier=Avnet+Asia, Contact Plating=Tin, Current Rating=1A, Element Configuration=Single, Forward Current=1A, Lead Free="Lead Free", Manufacturer Part Number=S1A, Max Reverse Voltage (DC)=50V, Mount="Surface Mount", Number of Pins=2, Output Current=1A, Packaging="Tape and Reel", Peak Non-Repetitive Surge Current=30A, Polarity=Standard, Pricing="5=0.184, 25=0.179, 100=0.0727, 250=0.0669, 500=0.0667, 1000=0.0364, 5000=0.0293 (EUR)", Radiation Hardening=No, REACH SVHC="No SVHC", Recovery Time=1800ns, Reverse Recovery Time=1.8us, Reverse Voltage=50V, RoHS=Yes, Stock=34555, Supplier 1=Farnell, Voltage Rating (DC)=50V, Weight=0.106g, Width=5.28mm
D2: "DIODE GEN PURP 75V 150MA SOD323F", Average Rectified Current=150mA, Forward Voltage=1V, Manufacturer="ON Semiconductor / Fairchild", Max Forward Surge Current (Ifsm)=2A, Max Operating Temperature=150°C, Max Repetitive Reverse Voltage (Vrrm)=75V, Min Operating Temperature=-55°C, Package Quantity=1, Peak Reverse Current=5uA, Power Dissipation=200mW, Supplier Part Number 1=2453269, ComponentLink1Description=https://datasheet.ciiva.com/25968/1n914bws-25968945.pdf?src-supplier=Avnet+Europe, ComponentLink1URL=https://datasheet.ciiva.com/25968/1n914bws-25968945.pdf?src-supplier=Avnet+Europe, ComponentLink2Description=https://datasheet.ciiva.com/30479/0900766b810e1cd3-30479206.pdf?src-supplier=RSComponents, ComponentLink2URL=https://datasheet.ciiva.com/30479/0900766b810e1cd3-30479206.pdf?src-supplier=RSComponents, ComponentLink3Description=https://datasheet.ciiva.com/15208/getdatasheetpartid-127819-15208358.pdf?src-supplier=Verical, ComponentLink3URL=https://datasheet.ciiva.com/15208/getdatasheetpartid-127819-15208358.pdf?src-supplier=Verical, ComponentLink4Description=https://datasheet.ciiva.com/8300/1n914bws-8300360.pdf?src-supplier=Avnet, ComponentLink4URL=https://datasheet.ciiva.com/8300/1n914bws-8300360.pdf?src-supplier=Avnet, ComponentLink5Description=https://datasheet.ciiva.com/910/1n4148ws-910380.pdf?src-supplier=Digi-Key, ComponentLink5URL=https://datasheet.ciiva.com/910/1n4148ws-910380.pdf?src-supplier=Digi-Key, ComponentLink6Description=https://datasheet.ciiva.com/910/1n4148ws-910381.pdf?src-supplier=Digi-Key, ComponentLink6URL=https://datasheet.ciiva.com/910/1n4148ws-910381.pdf?src-supplier=Digi-Key, ComponentLink7Description=https://datasheet.ciiva.com/910/1n4148ws-910382.pdf?src-supplier=Digi-Key, ComponentLink7URL=https://datasheet.ciiva.com/910/1n4148ws-910382.pdf?src-supplier=Digi-Key, Contact Plating=Tin, Element Configuration=Single, Forward Current=150mA, Height=1mm, Lead Free="Lead Free", Length=1.8mm, Manufacturer Part Number=1N4148WS, Max Reverse Voltage (DC)=75V, Mount="Surface Mount", Number of Pins=2, Packaging="Tape and Reel", Pricing="5=0.155, 25=0.151, 100=0.0529, 250=0.0498, 500=0.0477, 1000=0.0243, 5000=0.0193 (EUR)", Radiation Hardening=No, REACH SVHC="No SVHC", Recovery Time=4ns, Reverse Recovery Time=4ns, Reverse Voltage=75V, RoHS=Yes, Stock=379338, Supplier 1=Farnell, Weight=0.0276g, Width=1.35mm
D3 D4: "LED", Package=T1, Dimensions=3mm, Price=0.01
D5 D6: library part D_1N4148, Package=DO-35, PinSpacing=5.08mm, Price=0.01
FSW LED: "2 Pins male XH header", Price=0.1
GAIN: library part POT_250kB_ALPHA_16mm, "250k Lin potentiometer round shaft", Package="PCB Mounted", Dimensions=16mm, Price=0.5